# EAGLE board Adapter-MiniStamps-002 (EAGLE 7.3.0)
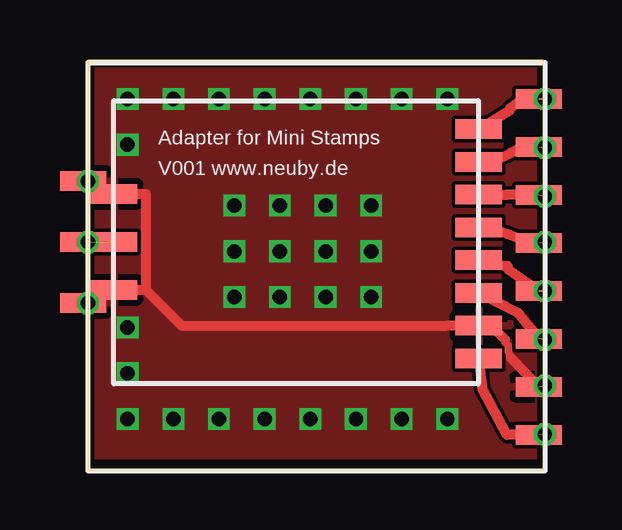
[diagram p0: board, top side]
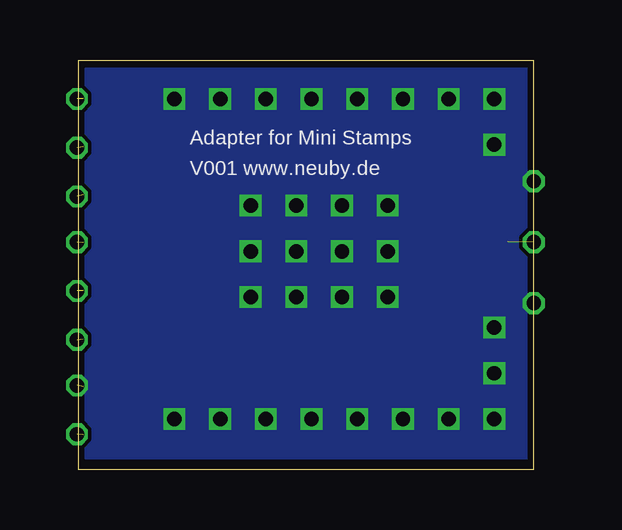
[diagram p1: board, bottom side, seen from below]

Size 18.97 x 17.07 mm. Coordinates in mm from the lower left corner, seen from the top.
Outline: 0,17.07 0,0 18.97,0 18.97,17.07 0,17.07
Copper layers (1*16): Top 0.035mm / dielectric 1.5mm / Bottom 0.035mm
Design rules "SeeedStudio_2layer_DRU_no_angle_20140221": minimum track width 6mil, minimum drill 12mil, track to track 6mil, track to pad 6mil, pad to pad 6mil, via to via 6mil, smd to smd 0mil, copper to edge 10mil, drill to drill 10mil, minimum pad ring 10mil, minimum via ring 6mil, stop-mask expansion 2mil, vias tented up to drill 100mil, thermal gap 10mil
Net classes: 0 default: width 0.406 mm; 1 PWR: width 0.305 mm

## Footprints (pad centres in the part's own frame; a part is rotated, then mirrored left to right if it is on the bottom)
CC1101_MODULE1_SMD = smd 1.93 x 0.813: ANT 19,5.96; CSN 0,0; GDO0 0,2; GDO2 0,4; GND@0 0,12; GND@1 19,8.5; GND@2 19,3.42; MISO 0,6; MOSI 0,10; SCLK 0,8; VCC 0,14
CC1101_MODULE1_SMD' = smd 1.93 x 0.813: ANT 14.889,4.381; CSN -0.318,-0.318; GDO0 -0.318,1.048; GDO2 -0.318,2.413; GND@0 -0.318,7.872; GND@1 14.889,6.381; GND@2 14.889,2.381; MISO -0.318,3.777; MOSI -0.318,6.508; SCLK -0.318,5.143; VCC -0.318,9.238

## Placement (x,y rotation side)
CC0  CC1101_MODULE1SMD  [CC1101_MODULE1_SMD]  18.78,15.45 180 top
RADIO0B  CC1101_MODULE1SMALL  [CC1101_MODULE1_SMD']  15.96,13.88 180 top

## Library data of the parts
CC0 = wireless
RADIO0B = Martin-Communication

## Nets
ANT: RADIO0B.ANT
CC_CS0: CC0.CSN RADIO0B.CSN
CC_IN_0: CC0.GDO2 RADIO0B.GDO2
CC_OUT_0: CC0.GDO0 RADIO0B.GDO0
GND: CC0.GND@0 CC0.GND@1 CC0.GND@2 RADIO0B.GND@0 RADIO0B.GND@1 RADIO0B.GND@2
MISO1: CC0.MISO RADIO0B.MISO
MOSI1: CC0.MOSI RADIO0B.MOSI
SCK1: CC0.SCLK RADIO0B.SCLK
VCC: CC0.VCC RADIO0B.VCC

## Tracks (layer width: path | path; a pad name or v marks a point on that pad's centre or on a via)
ANT  (via drill 0.6 pad 0.9)  (1 unrouted)
  other vias: -0.01,9.48
CC_CS0  (via drill 0.6 pad 0.9)  (1 unrouted)
  Top 0.406: CC0.CSN 18.12,15.45 17.59,15.07 17.59,15 RADIO0B.CSN
  other vias: 19.04,15.45
CC_IN_0  (via drill 0.6 pad 0.9)  (1 unrouted)
  Top 0.406: CC0.GDO2 18.12,11.45 17.46,11.45 17.45,11.46 RADIO0B.GDO2
  other vias: 19.04,11.39
CC_OUT_0  (via drill 0.6 pad 0.9)  (1 unrouted)
  Top 0.406: CC0.GDO0 18.12,13.45 17.59,13.2 16.84,12.83 RADIO0B.GDO0
  other vias: 19.04,13.42
GND  (via drill 0.6 pad 0.9)  (1 unrouted)
  Top 0.305: 17.64,4.66 17.51,4.91 17.51,5.17 17.39,5.29 17.39,5.42 | RADIO0B.GND@2 CC0.GND@2 | CC0.GND@1 0.5,7.32 RADIO0B.GND@1
  Top 0.406: 2.4,7.5 3.89,6 14.96,6 15.62,6 RADIO0B.GND@0 16.88,5.93 17.39,5.42 | 2.4,7.5 1.74,7.5 RADIO0B.GND@1 | RADIO0B.GND@2 2.4,11.5 2.4,7.5 | CC0.GND@0 17.64,4.66
  other vias: -0.01,6.94 -0.01,12.02 19.04,3.51 1.64,15.45 1.64,13.55 3.54,15.45 5.45,15.45 7.35,15.45 9.26,15.45 11.16,15.45 13.07,15.45 14.97,15.45 1.64,2.12 1.64,4.02 1.64,5.93 3.54,2.12 5.45,2.12 7.35,2.12 9.26,2.12 11.16,2.12 13.07,2.12 14.97,2.12 6.08,11.01 6.08,9.1 6.08,7.2 7.99,7.2 9.89,7.2 11.8,7.2 11.8,9.1 11.8,11.01 9.89,11.01 7.99,11.01 7.99,9.1 9.89,9.1
  pour Top: 0.24,16.59 18.66,16.59 18.66,0.59 0.24,0.59
  pour Bottom: 0.24,16.59 18.66,16.59 18.66,0.59 0.24,0.59
MISO1  (via drill 0.6 pad 0.9)  (1 unrouted)
  Top 0.406: CC0.MISO 18.33,9.45 17.46,9.83 16.81,10.1 RADIO0B.MISO
  other vias: 19.04,9.48
MOSI1  (via drill 0.6 pad 0.9)  (1 unrouted)
  Top 0.406: RADIO0B.MOSI 17.39,6.82 17.89,6.56 CC0.MOSI
  other vias: 19.04,5.42
SCK1  (via drill 0.6 pad 0.9)  (1 unrouted)
  Top 0.406: CC0.SCLK 17.48,8.38 17.48,8.48 RADIO0B.SCLK
  other vias: 19.04,7.45
VCC  (via drill 0.6 pad 0.9)  (1 unrouted)
  Top 0.406: CC0.VCC 17.46,1.45 16.45,3.33 RADIO0B.VCC
  other vias: 19.04,1.48

## Text on the board
tNames: Adapter for Mini Stamps | V001 www.neuby.de
bNames: Adapter for Mini Stamps | V001 www.neuby.de